# Altium PCB radvin_janati.PcbDoc
Units mm, origin at the board's own origin, x right, y up, seen from the top; angles counter-clockwise.
Board outline 96.27 x 58.42 mm, 2 copper layers (Top Layer, Bottom Layer); 26 components, 22 nets, 112 pads, 10 vias.
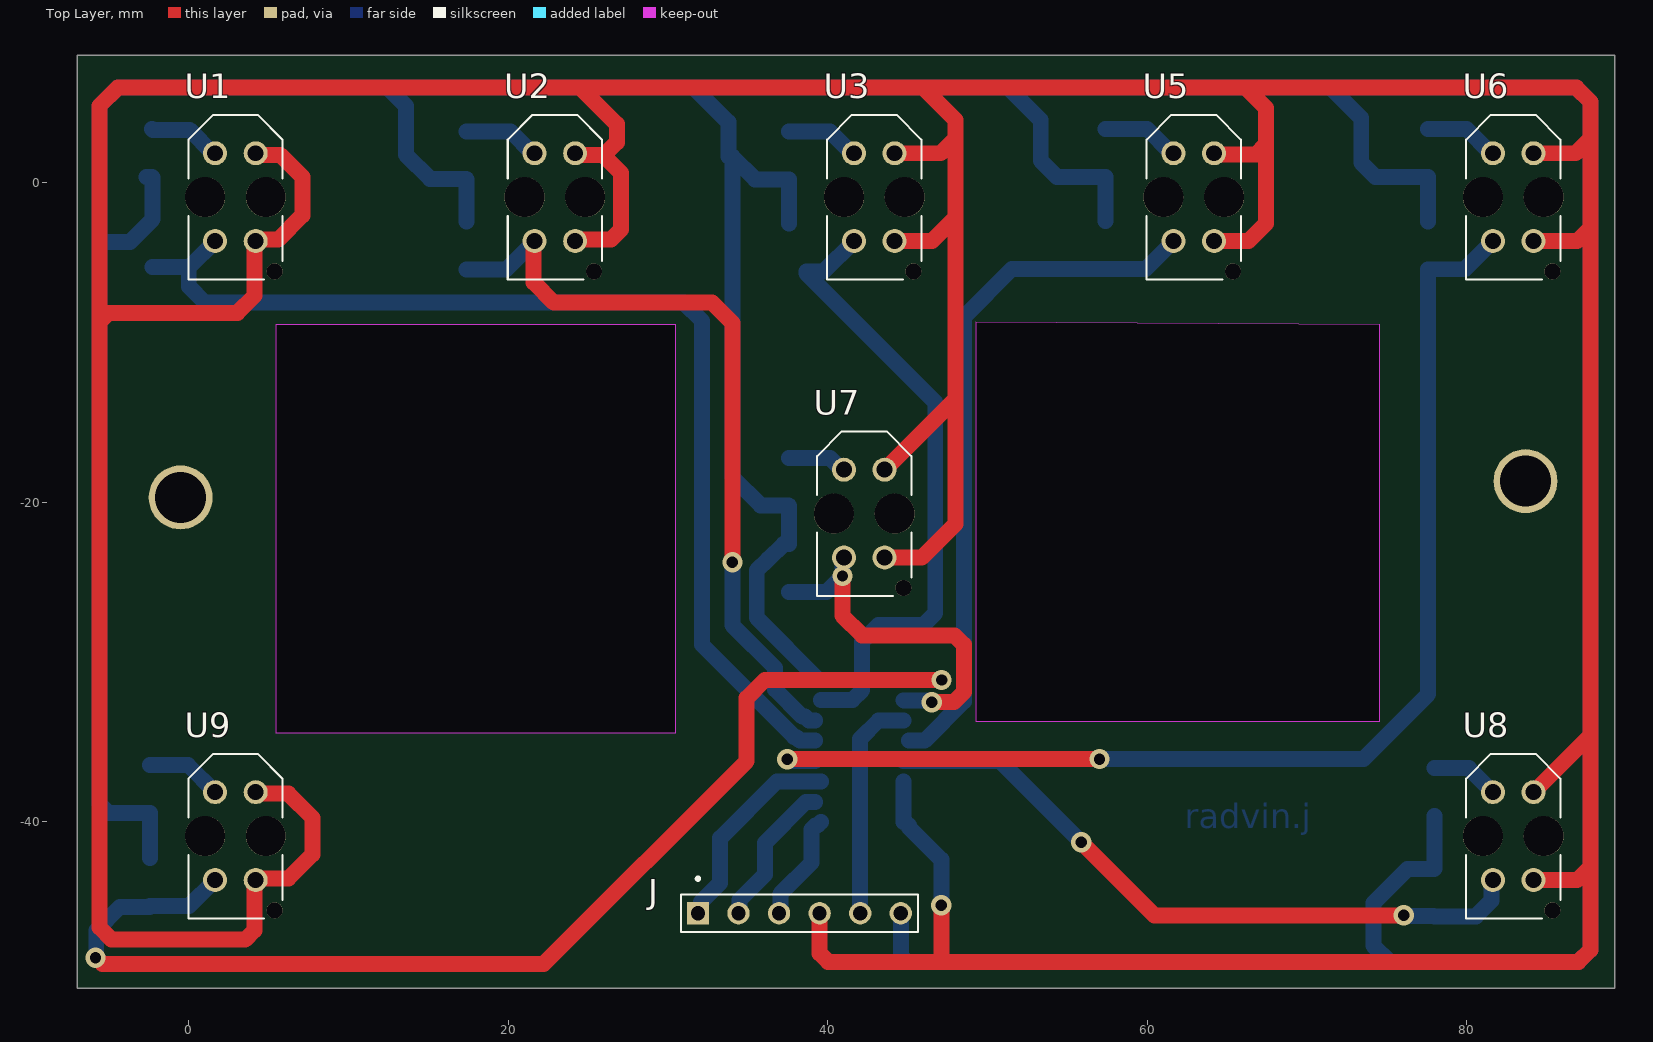
[diagram p0: Top Layer view]
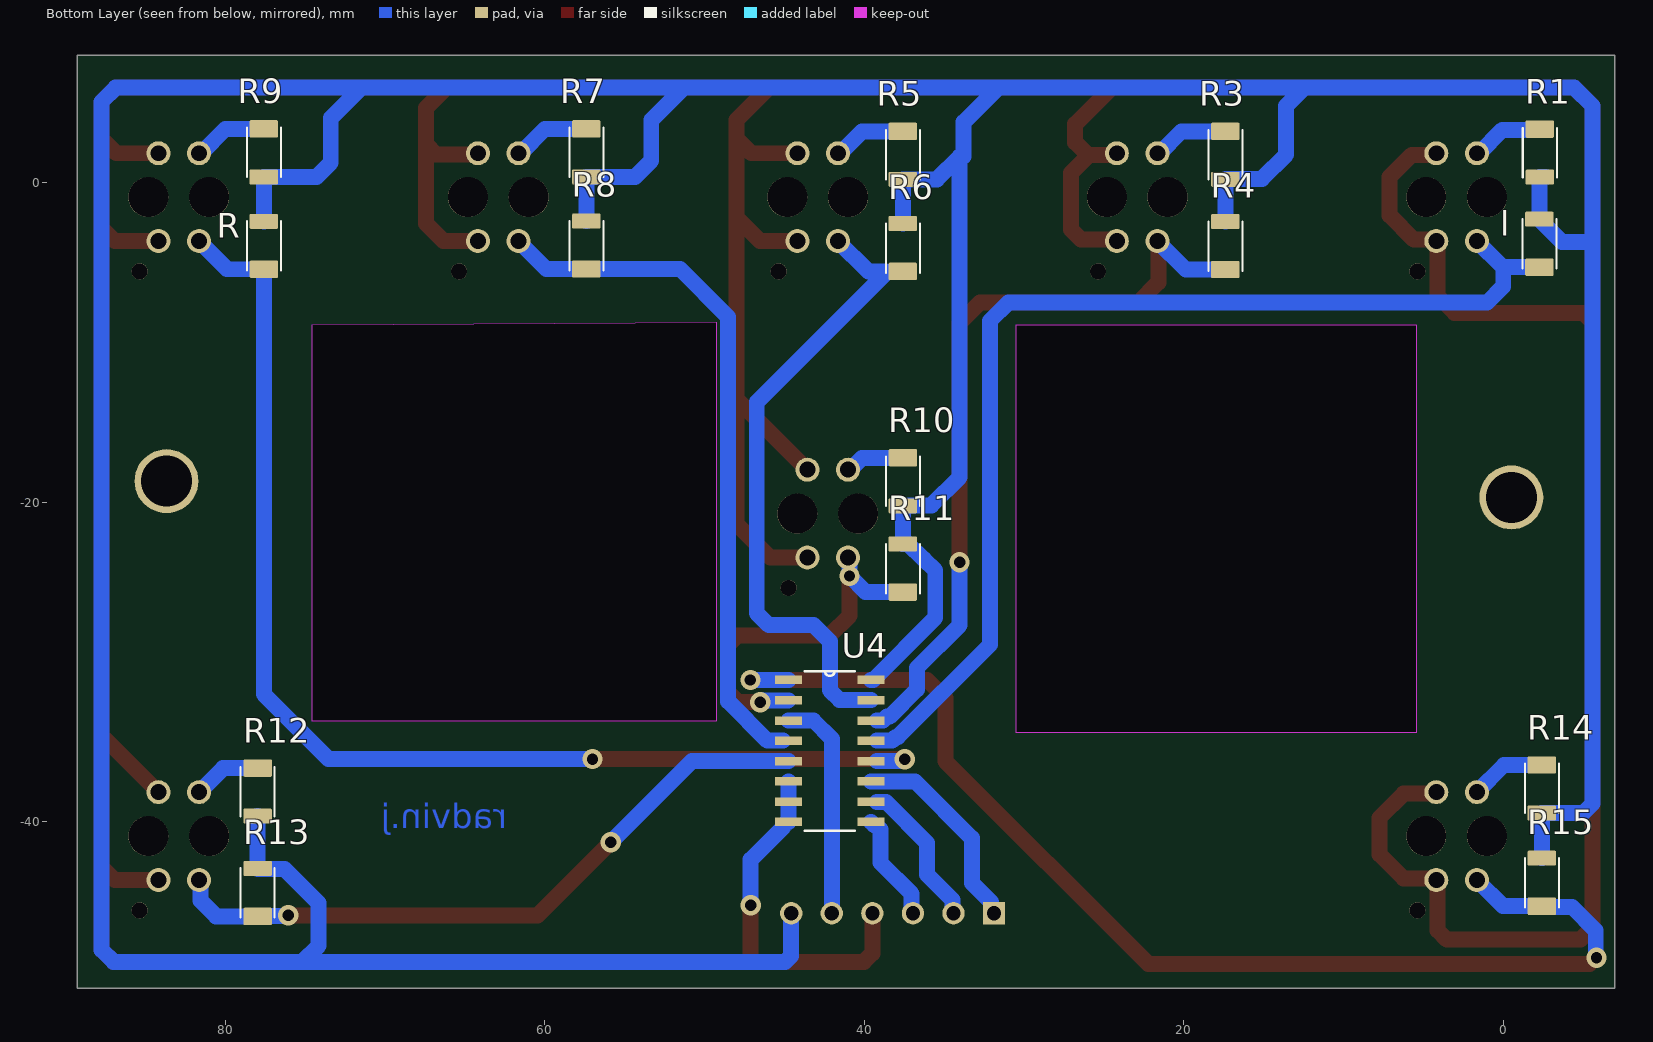
[diagram p1: Bottom Layer view, seen from below]
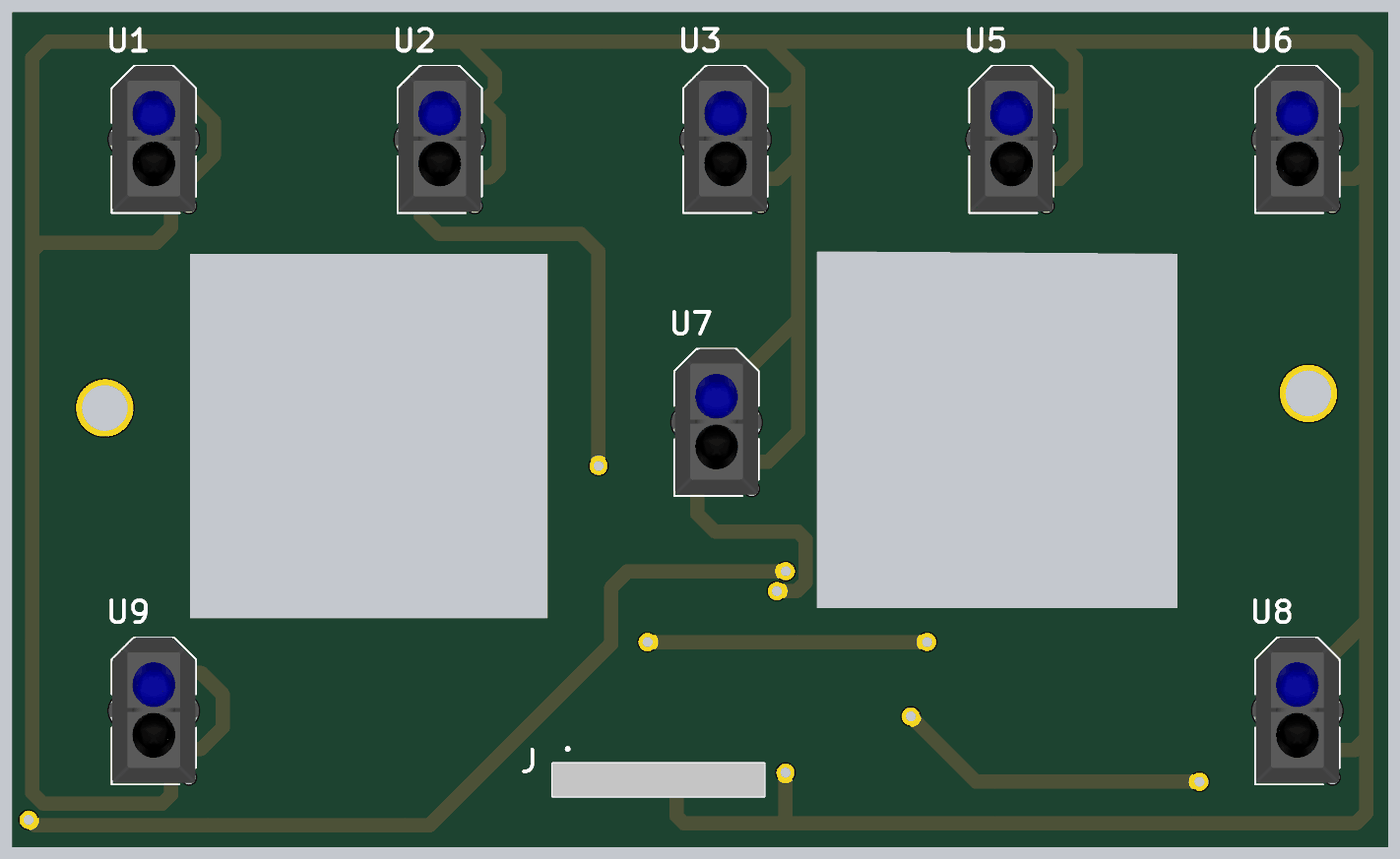
[diagram p2: 3D render of the assembled board from above, using the file's embedded part models]
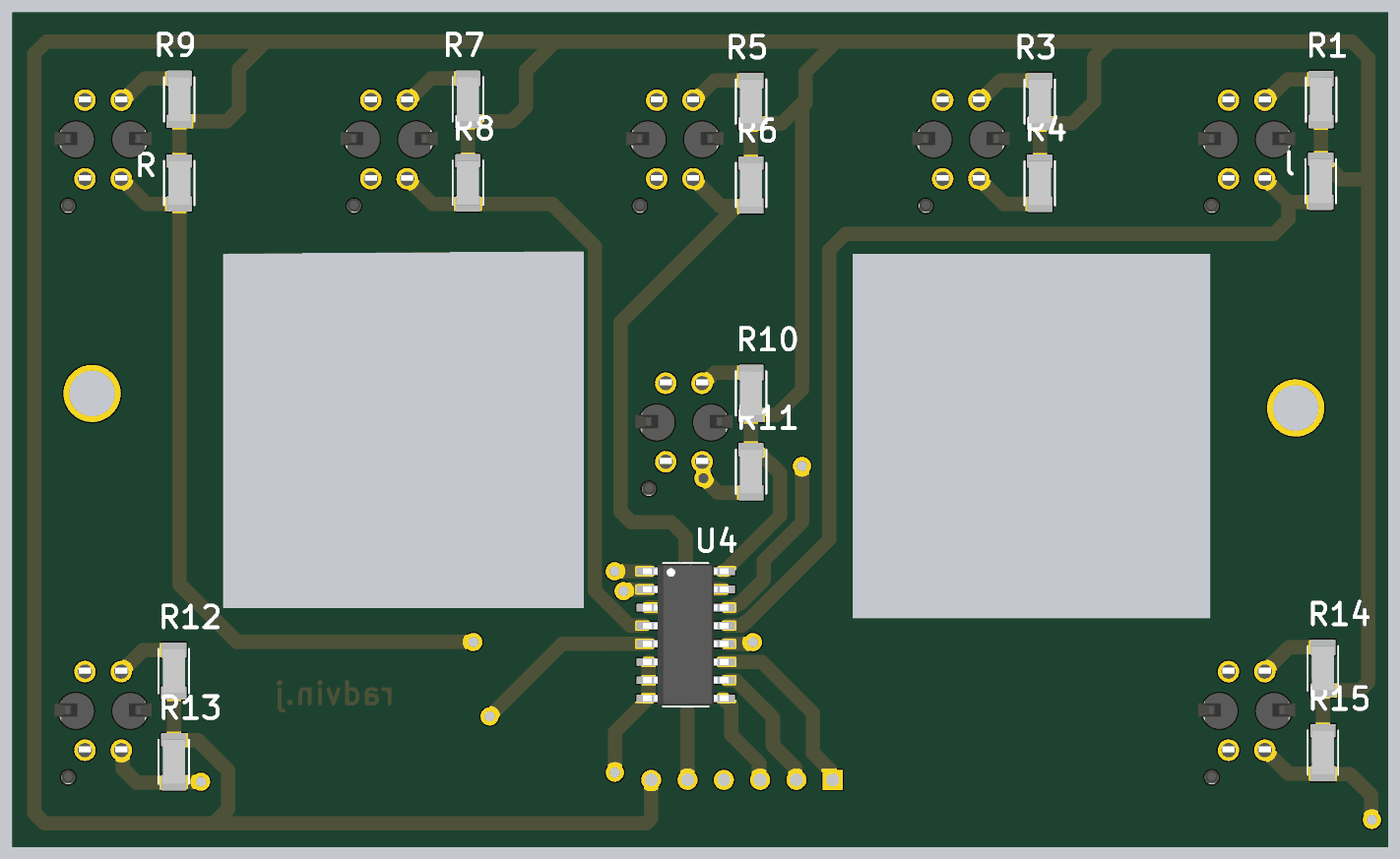
[diagram p3: 3D render of the assembled board from below, using the file's embedded part models]

## Layer stack, top to bottom
Top Solder: solder mask 0.0102, Solder Resist, Dk 3.5
Top Layer: signal copper 0.0356
Dielectric 1: dielectric 0.32, FR-4, Dk 4.8
Bottom Layer: signal copper 0.0356
Bottom Solder: solder mask 0.0102, Solder Resist, Dk 3.5

## Board outline
-6.985,-50.419 89.281,-50.419 89.281,8.001 -6.985,8.001
cut-out: 49.276,-8.714 49.276,-33.704 74.549,-33.704 74.549,-8.883
cut-out: 5.461,-8.89 5.461,-34.417 30.48,-34.417 30.48,-8.89

## Design rules (kind name [scope] priority, off if disabled: settings)
Clearance [All] p1: gap=0.254 ignorepadtopadclearanceinfootprint=FALSE except(0: Arc-Hole Track-Hole SMDPad-Hole THPad-Hole Via-Hole Fill-Hole Poly-Hole Region-Hole Text-Hole)
PolygonConnect [All] p1: connectstyle=Relief reliefconductorwidth=0.254 reliefentries=4 polygonreliefangle="90 Angle" airgapwidth=0.254
RoutingVias [All] p1: holewidth=0.711 width=1.27 viastyle="Through Hole" minholewidth=0.711 minwidth=1.27 maxholewidth=0.711 maxwidth=1.27
SolderMaskExpansion [All] p1: expansion=0.102 istentingtop=FALSE
Width [All] p1: maxlimit=1.5 minlimit=0.5 preferedwidth=1 minimp=50.000000 maximp=50.000000 favimp=50.000000
30 further rules are at their usual default settings.

## Components (designator, comment, footprint, x,y, rotation, side; value= is the part's Value field where it differs from the comment)
J "103321-6" TE_103321-6 38.227,-45.72 r0 top
l "2-1879462-9" RESC3115X65N -2.261,-3.81 r90 bottom (schematic designator R2)
R "2-1879462-9" RESC3115X65N 77.597,-3.937 r90 bottom
R1 "2-1879462-9" RESC3115X65N -2.286,1.905 r270 bottom
R3 "2-1879462-9" RESC3115X65N 17.399,1.769 r270 bottom
R4 "2-1879462-9" RESC3115X65N 17.399,-3.953 r90 bottom
R5 "2-1879462-9" RESC3115X65N 37.592,1.769 r270 bottom
R6 "2-1879462-9" RESC3115X65N 37.592,-4.073 r90 bottom
R7 "2-1879462-9" RESC3115X65N 57.404,1.921 r270 bottom
R8 "2-1879462-9" RESC3115X65N 57.404,-3.921 r90 bottom
R9 "2-1879462-9" RESC3115X65N 77.597,1.921 r270 bottom
R10 "2-1879462-9" RESC3115X65N 37.592,-18.669 r270 bottom
R11 "2-1879462-9" RESC3115X65N 37.592,-24.146 r90 bottom
R12 "2-1879462-9" RESC3115X65N 77.978,-38.1 r270 bottom
R13 "2-1879462-9" RESC3115X65N 77.978,-44.45 r90 bottom
R14 "2-1879462-9" RESC3115X65N -2.413,-37.905 r270 bottom
R15 "2-1879462-9" RESC3115X65N -2.413,-43.815 r90 bottom
U1 "TCRT5000" OPTO_TCRT5000 2.921,-0.889 r90 top
U2 "TCRT5000" OPTO_TCRT5000 22.921,-0.889 r90 top
U3 "TCRT5000" OPTO_TCRT5000 42.921,-0.889 r90 top
U4 "74HC4051D" SOIC127P600X175-16N 42.164,-35.56 r180 bottom
U5 "TCRT5000" OPTO_TCRT5000 62.921,-0.889 r90 top
U6 "TCRT5000" OPTO_TCRT5000 82.921,-0.889 r90 top
U7 "TCRT5000" OPTO_TCRT5000 42.291,-20.701 r90 top
U8 "TCRT5000" OPTO_TCRT5000 82.921,-40.889 r90 top
U9 "TCRT5000" OPTO_TCRT5000 2.921,-40.889 r90 top

## Footprints (in the part's own frame and the unit in brackets; to place one, negate y for a bottom-side part, rotate by r counter-clockwise, add the part's x,y. Pads: shape width x height; smd on the part's side, far side on the other; paste and mask are expansions set on the pad)
OPTO_TCRT5000 [mm]
  round 1.5 hole 1: A(2.75,1.27) CATH(2.75,-1.27) COLL(-2.75,1.27) E(-2.75,-1.27)
  round 1 hole 1 unplated: ""(-4.65,-2.45)
  round 2.5 hole 2.5 unplated: ""(0,1.9) ""(0,-1.9)
  silkscreen extent -5.15,-2.95 5.15,2.95, body extent -5.04,-3.4 5.16,3.4, height 7.2
RESC3115X65N [mm]
  rrect14% 1.09x1.77 smd: 1(-1.465,0)
  rrect14% 0.94x1.77 smd: 2(1.54,0)
  silkscreen extent -1.55,-1.06 1.55,1.07, body extent -1.55,-0.77 1.55,0.77, height 0.56
SOIC127P600X175-16N [mil]
  rect 67x21 smd: 1(-102,175) 2(-102,125) 3(-102,75) 4(-102,25) 5(-102,-25) 6(-102,-75) 7(-102,-125) 8(-102,-175) 9(102,-175) 10(102,-125) 11(102,-75) 12(102,-25) 13(102,25) 14(102,75) 15(102,125) 16(102,175)
  silkscreen extent -62,-197 62,197, body extent -118,-195 118,195, height 69
TE_103321-6 [mm]
  rect 1.398x1.398 hole 0.89: 1(-6.35,0)
  round 1.398 hole 0.89: 2(-3.81,0) 3(-1.27,0) 4(1.27,0) 5(3.81,0) 6(6.35,0)
  silkscreen extent -7.42,-1.17 7.42,2.27, body extent -7.42,-1.17 7.42,1.17, height 10.58

## Part data
J: "Pin 06 MODII HDR SRST B / A .100CL 6 POS", Package=None, Availability=Unavailable, MF="TE Connectivity", Mouser-Purchase-URL=https://snapeda.com/shop?store=Mouser&id=4238467, MP=103321-6, Price=None, SnapEDA_Link=https://www.snapeda.com/parts/103321-6/TE%20Connectivity/view-part/4238467/?ref=snap
l R R1 R3 R4 R5 R6 R7 R8 R9 R10 R11 R12 R13 R14 R15: "RES 0.24 OHM 1% 1/4W 1206", Package=1206, Power_Rating=".25 W", Resistance=24, Tolerance=1%, Availability=Unavailable, EU_RoHS_Compliance="Compliant with Exemptions", MF="TE Connectivity", MP=2-1879462-9, Price=None, SnapEDA_Link=https://www.snapeda.com/parts/2-1879462-9/TE%20Connectivity/view-part/2213899/?ref=snap
U1 U2 U3 U5 U6 U7 U8 U9: "950 nm 60 mA Through Hole Reflective Optical Sensor with Transistor Output", Package=None, Availability=Unavailable, MP=TCRT5000, Price=None
U4: "1 Circuit IC Switch 8:1 130Ohm 16-SOIC", Package="SOIC-16 Toshiba", Availability="In Stock", Check_prices=https://www.snapeda.com/parts/74HC4051D/Toshiba/view-part/?ref=eda, MF=Toshiba, MP=74HC4051D, Price=None, Purchase-URL=https://pricing.snapeda.com/search/part/74HC4051D/?ref=eda, SnapEDA_Link=https://www.snapeda.com/parts/74HC4051D/Toshiba/view-part/?ref=snap

## Free pads (board coordinates)
  round 4 hole 3.2: 2(83.693,-18.669) 3(-0.508,-19.685)

## Via types
v1: diameter 1.27, hole 0.711, Top Layer to Bottom Layer, 10 vias

## Nets (pads, with @x,y where several pads share a name; then routed paths per layer and width w, separated by ;. In a path a pad name is that pad's centre, name@x,y a point inside that pad or via, vN(x,y) a via of type N, cw(c..) or ccw(c..) an arc to the next point about the centre after c; other vN are vias at no path point)
1: l.1 U1.COLL U4.13 | length 68.7
  Bottom Layer w1: l.1 0.015,-5.275 ; U1.COLL 0.015,-5.275 ; U4.13@39.222,-34.909 38.262,-34.909 38.029,-34.676 37.907,-34.676 32.131,-28.9 32.131,-8.636 30.988,-7.493 1.016,-7.493 0,-6.477 0,-5.29 0.015,-5.275
2: R4.1 U2.COLL U4.14 | length 48.5
  Top Layer w1: U2.COLL 21.59,-3.7 21.59,-6.223 22.86,-7.493 32.766,-7.493 34.036,-8.763 v1(34.036,-23.749)
  Bottom Layer w1: R4.1 19.872,-5.418 U2.COLL ; v1(34.036,-23.749) 34.036,-27.686 36.703,-30.353 36.703,-31.699 38.41,-33.406 38.583,-33.406 38.817,-33.639 U4.14@39.222,-33.639
3: R6.1 U3.COLL U4.15 | length 39.7
  Bottom Layer w1: U4.15 39.589,-32.369 41.545,-32.369 42.164,-31.75 42.164,-28.702 43.18,-27.686 45.974,-27.686 46.736,-26.924 46.736,-13.716 38.672,-5.652 38.672,-5.538 39.752,-5.538 U3.COLL
"3 out": J.5 U4.3 | length 14.1
  Bottom Layer w1: J.5 42.037,-34.798 43.183,-33.652 44.752,-33.652 U4.3
4: R.1 U4.12 U6.COLL | length 75
  Top Layer w1: v1(37.465,-36.076) 37.469,-36.072 57.019,-36.072 v1(57.023,-36.068)
  Bottom Layer w1: v1(37.465,-36.076) 37.538,-36.076 37.641,-36.179 U4.12@39.222,-36.179 ; v1(57.023,-36.068) 73.533,-36.068 77.597,-32.004 R.1 79.888,-5.402 U6.COLL
5: R15.1 U4.1 U9.COLL | length 75.7
  Top Layer w1: v1(-5.842,-48.514) -5.769,-48.514 -5.388,-48.895 22.225,-48.895 34.925,-36.195 34.925,-32.258 36.068,-31.115 v1(47.133,-31.115)
  Bottom Layer w1: v1(-5.842,-48.514) -5.79,-48.462 -5.79,-46.811 -4.304,-45.325 -2.458,-45.325 R15.1 0.01,-45.28 U9.COLL ; U4.1 v1(47.133,-31.115)
6: R13.1 U4.5 U8.COLL | length 42.6
  Top Layer w1: v1(55.88,-41.275) 60.452,-45.847 v1(76.073,-45.847)
  Bottom Layer w1: U4.5 50.8,-36.195 v1(55.88,-41.275) ; v1(76.073,-45.847) 76.107,-45.881 77.944,-45.881 R13.1 80.577,-45.915 81.555,-44.937 81.555,-43.735 U8.COLL
7: R11.1 U4.2 U7.COLL | length 22.8
  Top Layer w1: v1(40.925,-24.607) 40.925,-27.082 42.164,-28.321 47.936,-28.321 48.522,-28.907 48.522,-31.877 47.895,-32.504 46.514,-32.504 v1(46.512,-32.507)
  Bottom Layer w1: R11.1 39.921,-25.611 v1(40.925,-24.607) 40.925,-23.547 U7.COLL ; U4.2 44.768,-32.398 46.33,-32.398 46.439,-32.507 v1(46.512,-32.507)
8: R8.1 U4.4 U5.COLL | length 43.6
  Bottom Layer w1: U4.4@45.106,-34.909 46.073,-34.909 48.522,-32.46 48.522,-8.402 51.538,-5.386 R8.1 59.904,-5.386 U5.COLL
+5: J.6 l.2 R1.2 R3.2 R4.2 R5.2 R6.2 R7.2 R8.2 R9.2 R10.2 R11.2 R12.2 R13.2 R14.2 R15.2 R.2 U4.16 | length 350.2
  Bottom Layer w1: R1.2@-2.641,0.365 R1.2 -2.273,0.352 -2.273,-2.257 l.2 -3.674,-3.683 -5.588,-3.683 ; R15.2 R14.2 -5.002,-39.445 -5.588,-38.859 -5.588,-3.683 ; R4.2 R3.2 17.374,0.254 15.113,0.254 13.589,1.778 13.589,4.826 12.446,5.969 ; R6.2@37.585,-2.54 R6.2 R5.2 35.458,0.229 34.036,1.651 ; U4.16 39.456,-31.115 35.56,-27.219 35.56,-24.257 36.267,-23.55 36.293,-23.55 37.237,-22.606 R11.2 R10.2 37.562,-20.179 35.8,-20.179 34.036,-18.415 34.036,1.651 ; J.6 44.577,-48.387 44.958,-48.768 75.184,-48.768 ; R8.2 R7.2 54.356,0.381 53.34,1.397 53.34,3.937 51.308,5.969 ; R.2 R9.2 74.295,0.381 73.406,1.27 73.406,4.064 71.501,5.969 ; R12.2 R13.2 77.948,-42.94 76.313,-42.94 74.168,-45.085 74.168,-47.752 75.184,-48.768 ; -5.588,-3.683 -5.588,4.826 -4.445,5.969 12.446,5.969 ; 12.446,5.969 31.623,5.969 ; 31.623,5.969 51.308,5.969 ; 31.623,5.969 33.782,3.81 33.782,1.651 34.036,1.651 ; 51.308,5.969 71.501,5.969 ; 71.501,5.969 86.868,5.969 87.757,5.08 87.757,-48.006 86.995,-48.768 75.184,-48.768
GND: J.4 U1.CATH U1.E U2.CATH U2.E U3.CATH U3.E U4.6 U4.7 U4.8 U5.CATH U5.E U6.CATH U6.E U7.CATH U7.E U8.CATH U8.E U9.CATH U9.E | length 407.1
  Top Layer w1: U9.CATH 4.287,-38.235 6.231,-38.235 7.747,-39.751 7.747,-42.037 6.241,-43.543 4.287,-43.543 U9.E 4.117,-43.713 4.117,-46.785 3.531,-47.371 -4.826,-47.371 -5.588,-46.609 -5.588,-8.714 ; U1.CATH 4.287,1.765 5.728,1.765 7.112,0.381 7.112,-2.032 5.601,-3.543 4.287,-3.543 U1.E 4.117,-3.713 4.117,-7.059 3.048,-8.128 -5.002,-8.128 -5.588,-8.714 ; U2.E 24.287,-3.543 26.429,-3.543 27.051,-2.921 27.051,0.635 25.921,1.765 ; U2.CATH 24.287,1.765 25.921,1.765 ; J.4 39.497,-48.236 40.029,-48.768 47.117,-48.768 ; U7.E 45.891,-23.451 48.006,-21.336 48.006,-13.506 ; U7.CATH 48.006,-13.506 ; U3.E 46.526,-3.639 48.006,-2.159 ; U3.CATH 47.073,1.861 48.006,2.794 ; v1(47.117,-45.212) 47.117,-48.768 ; U5.E 66.338,-3.639 67.437,-2.54 67.437,2.413 ; U5.CATH 64.274,1.778 66.802,1.778 67.437,2.413 ; U8.E 86.917,-43.639 87.757,-42.799 ; U8.CATH 87.757,-34.573 ; U6.E 86.912,-3.639 87.757,-2.794 ; U6.CATH 86.824,1.861 87.757,2.794 ; -5.588,-8.714 -5.588,4.826 -4.445,5.969 24.511,5.969 ; 24.511,5.969 45.974,5.969 ; 24.511,5.969 26.797,3.683 26.797,2.54 26.022,1.765 25.921,1.765 ; 45.974,5.969 66.167,5.969 ; 45.974,5.969 48.006,3.937 48.006,2.794 ; 47.117,-48.768 86.995,-48.768 87.757,-48.006 87.757,-42.799 ; 48.006,-13.506 48.006,-2.159 ; 48.006,-2.159 48.006,2.794 ; 66.167,5.969 86.868,5.969 87.757,5.08 87.757,2.794 ; 66.167,5.969 67.437,4.699 67.437,2.413 ; 87.757,-42.799 87.757,-34.573 ; 87.757,-34.573 87.757,-2.794 ; 87.757,-2.794 87.757,2.794
  Bottom Layer w1: U4.6 U4.7 U4.8 44.872,-40.005 45.106,-40.238 45.106,-40.356 47.117,-42.367 v1(47.117,-45.212)
NetR1_1: R1.1 U1.A | length 4.6
  Bottom Layer w1: R1.1 -2.241,3.325 0.052,3.325 1.516,1.861 U1.A
NetR3_1: R3.1 U2.A | length 4.8
  Bottom Layer w1: R3.1 20.143,3.234 21.516,1.861 U2.A
NetR5_1: R5.1 U3.A | length 4.6
  Bottom Layer w1: R5.1 40.143,3.234 41.516,1.861 U3.A
NetR7_1: R7.1 U5.A | length 4.9
  Bottom Layer w1: R7.1 59.994,3.386 61.519,1.861 U5.A
NetR9_1: R9.1 U6.A | length 4.7
  Bottom Layer w1: R9.1 79.994,3.386 81.519,1.861 U6.A
NetR10_1: R10.1 U7.A | length 3.7
  Bottom Layer w1: R10.1 40.139,-17.204 40.886,-17.951 U7.A
NetR12_1: R12.1 U8.A | length 4.3
  Bottom Layer w1: R12.1 80.147,-36.635 U8.A
NetR14_1: R14.1 U9.A | length 4.8
  Bottom Layer w1: R14.1 -0.048,-36.44 U9.A
S0: J.1 U4.11 | length 13
  Bottom Layer w1: J.1 32.076,-45.521 32.076,-45.013 33.274,-43.815 33.274,-41.021 36.83,-37.465 U4.11
S1: J.2 U4.10 | length 9.3
  Bottom Layer w1: J.2 34.493,-45.644 34.493,-44.882 36.068,-43.307 36.068,-41.326 38.643,-38.751 U4.10@39.222,-38.751
S2: J.3 U4.9 | length 6.9
  Bottom Layer w1: J.3 37.033,-45.644 37.033,-44.501 38.989,-42.545 38.989,-40.591 38.989,-40.472 39.222,-40.238 39.34,-40.238 U4.9
pads on no net: U1. U2. U3. U5. U6. U7. U8. U9.

## Other copper
Bottom Layer:
  text "radvin.j" at 62.357,-40.386 h1.52

## Silkscreen, mask and mechanical layers (free items; w line width, h text height)
Mechanical 1:
  lines w0.254: -5.334,-50.419 -5.207,-50.419 ; -5.207,-50.419 cw(c-5.271,-48.831) -6.858,-48.895 -6.858,5.477 cw(c-4.266,5.461) -4.251,8.052 88.023,7.979 cw(c88.028,6.726) 89.281,6.731 89.281,-47.752 cw(c86.614,-47.752) 86.614,-50.419 -5.207,-50.419